# Altium PCB 主控板.PcbDoc
Units mil, origin at the board's own origin, x right, y up, seen from the top; angles counter-clockwise.
Board outline 3937.01 x 3937.01 mil, 2 copper layers (Top Layer, Bottom Layer); 40 components, 69 nets, 242 pads, 9 vias.
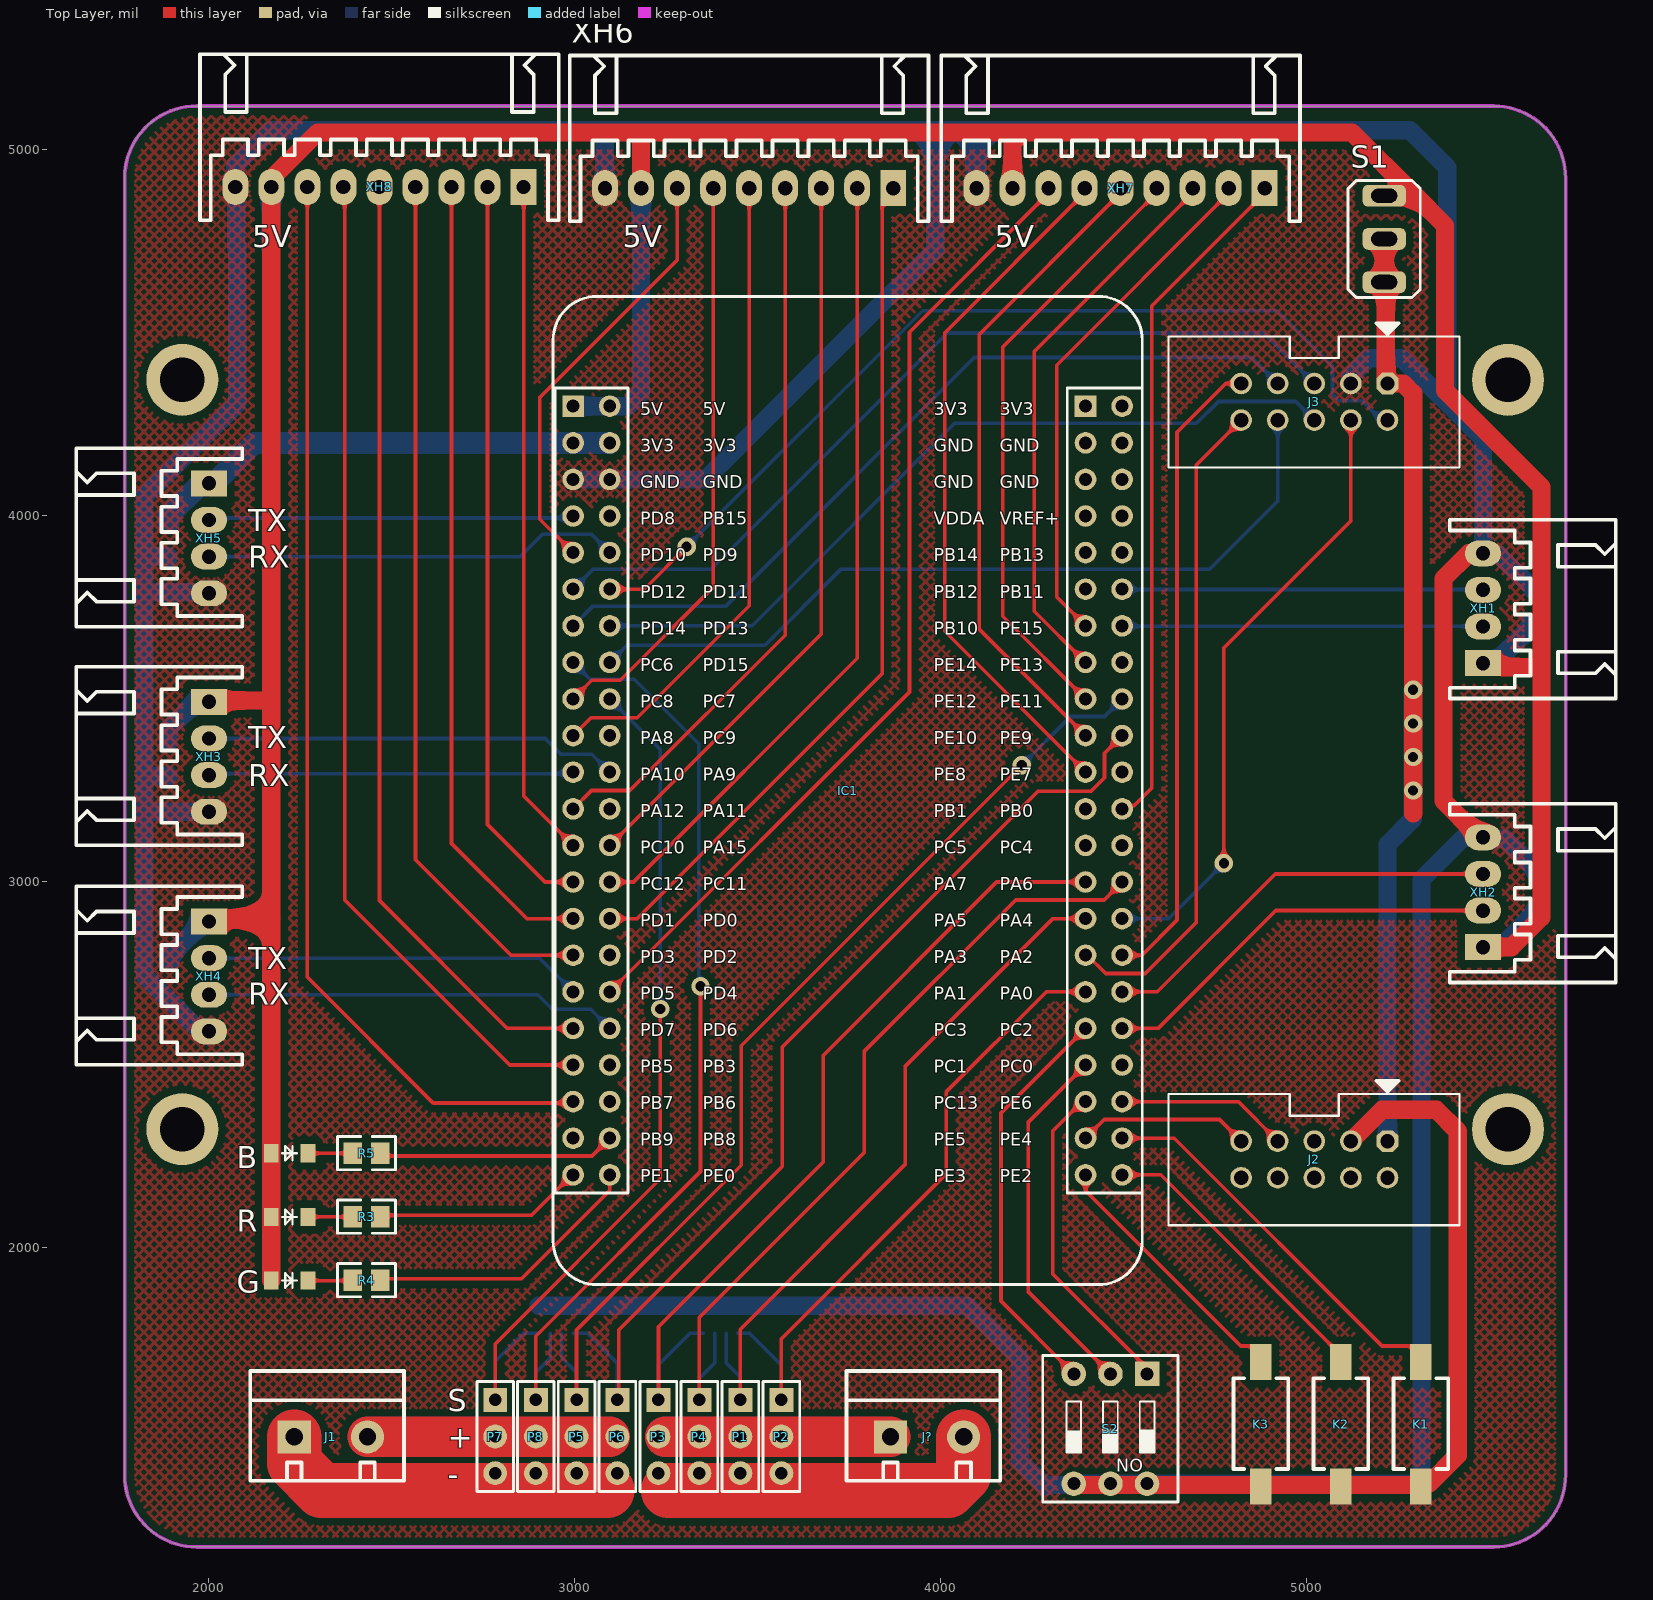
[diagram p0: Top Layer view]
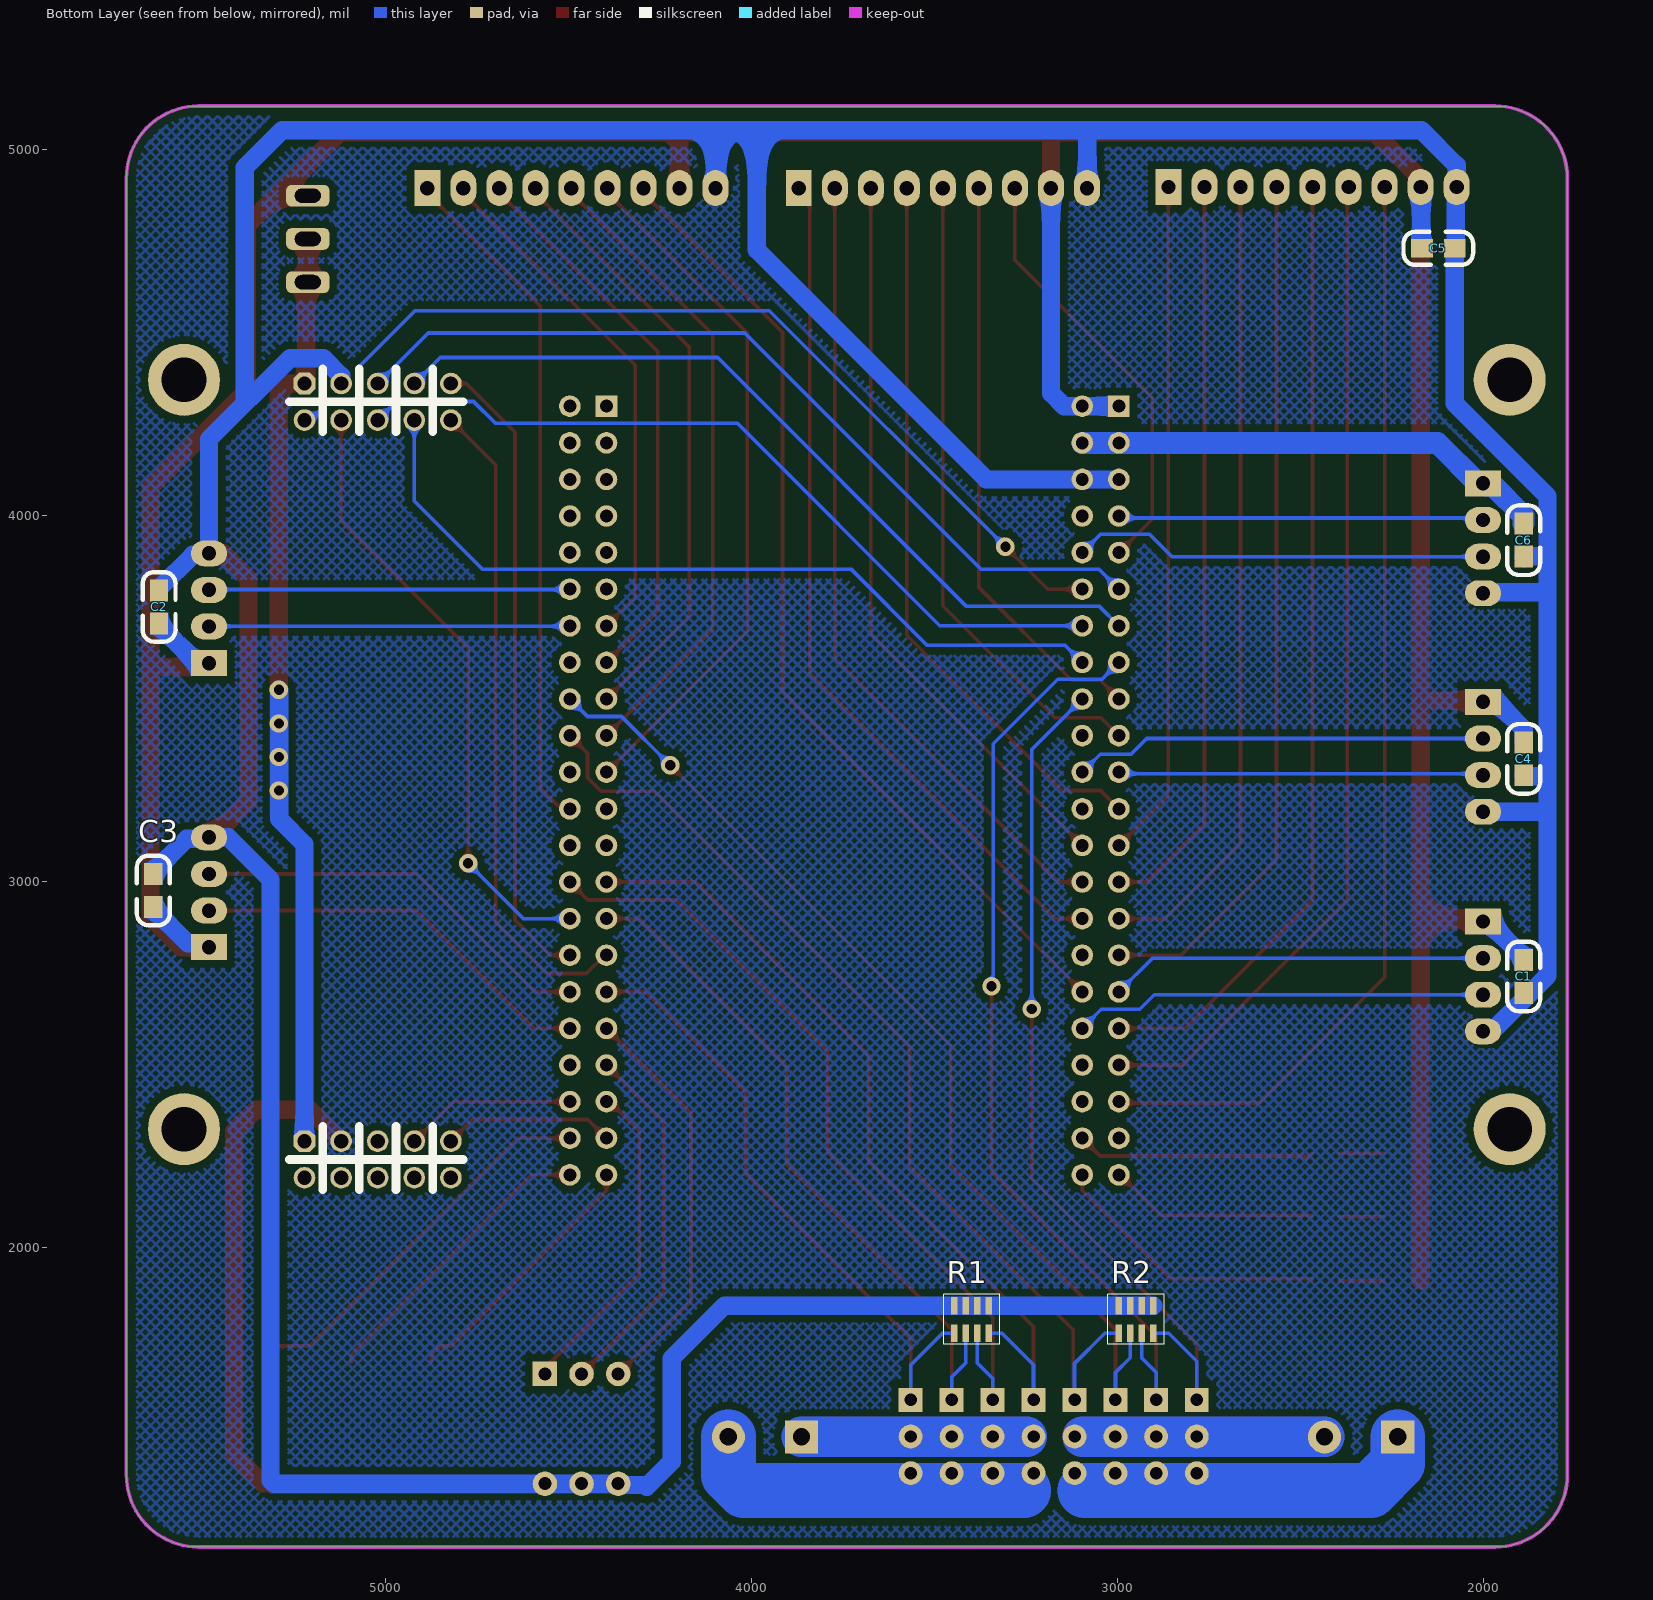
[diagram p1: Bottom Layer view, seen from below]

## Layer stack, top to bottom
Top Solder: solder mask 0.4, Solder Resist, Dk 3.5
Top Layer: signal copper 1.4
Dielectric 1: dielectric 12.6, FR-4, Dk 4.8
Bottom Layer: signal copper 1.4
Bottom Solder: solder mask 0.4, Solder Resist, Dk 3.5

## Board outline
1771.65,1377.95 ccw(c1968.5,1377.95) 1968.5,1181.1 5511.81,1181.1 ccw(c5511.81,1377.95) 5708.66,1377.95 5708.66,4921.26 ccw(c5511.81,4921.26) 5511.81,5118.11 1968.5,5118.11 ccw(c1968.5,4921.26) 1771.65,4921.26

## Design rules (kind name [scope] priority, off if disabled: settings)
Clearance [All] p1: gap=10 ignorepadtopadclearanceinfootprint=FALSE
PolygonConnect [All] p1: connectstyle=Direct reliefconductorwidth=10 reliefentries=4 polygonreliefangle="90 Angle" airgapwidth=10
RoutingVias [All] p1: holewidth=15.75 width=31.5 viastyle="Through Hole" minholewidth=15.75 minwidth=31.5 maxholewidth=28 maxwidth=50
SolderMaskExpansion [All] p1: expansion=4
Width [All] p1: maxlimit=19685.04 minlimit=10 preferedwidth=50 minimp=50.000000 maximp=50.000000 favimp=50.000000
30 further rules are at their usual default settings.

## Components (designator, comment, footprint, x,y, rotation, side; value= is the part's Value field where it differs from the comment)
B "LED" LED(0805) 2222.4,2257 r0 top (schematic designator LED3)
C1 "10uF" 0805C 1891.4,2696 r90 bottom
C2 "0.1uF" 0805C 5619,3794 r270 bottom
C3 "0.1uF" 0805C 5634.6,3019.29 r270 bottom
C4 "0.1uF" 0805C 1891.4,3290.35 r90 bottom
C5 "0.1uF" 0805C 2080,4729 r0 bottom
C6 "0.1uF" 0805C 1891.4,3887.71 r90 bottom
G "LED" LED(0805) 2222.4,1909 r0 top (schematic designator LED2)
IC1 "核心板" 核心板 3048.21,2234.79 r0 top locked
J1 "KF301-2P" KF301-5.0-2P 2235,1482 r0 top
J2 "IDC-10P" IDC2.54-10P 5222,2290 r180 top
J3 "IDC-10P" IDC2.54-10P 5222,4360 r180 top
J? "KF301-2P" KF301-5.0-2P 3864,1482 r0 top
K1 "KEY" SMD-3X6X4.3 5313,1686 r270 top
K2 "KEY" SMD-3X6X4.3 5094.5,1686 r270 top
K3 "KEY" SMD-3X6X4.3 4876,1686 r270 top
P1 "Header 3" "Header 3" 3454,1484 r0 top
P2 "Header 3" "Header 3" 3566,1484 r0 top
P3 "Header 3" "Header 3" 3230,1484 r0 top
P4 "Header 3" "Header 3" 3342,1484 r0 top
P5 "Header 3" "Header 3" 3006.29,1484 r0 top
P6 "Header 3" "Header 3" 3118,1484 r0 top
P7 "Header 3" "Header 3" 2784,1484 r0 top
P8 "Header 3" "Header 3" 2895.14,1484 r0 top
R "LED" LED(0805) 2222.4,2083 r0 top (schematic designator LED1)
R1 "Res-4" 排阻(4位贴片) 3446,1767 r90 bottom
R2 "Res-4" 排阻(4位贴片) 2997,1767 r90 bottom
R3 "10K" 0805 2432.4,2083.5 r0 top
R4 "10K" 0805 2432.4,1910 r0 top
R5 "10K" 0805 2432.4,2257 r0 top
S1 "钮子开关" 钮子开关(小) 5213,4873.11 r270 top
S2 "SW3-DIP6" DIP-3P 4465,1504 r180 top
XH1 "XH4" XH4/2.54mm/90 5483,3596 r90 top locked
XH2 "XH4" XH4/2.54mm/90 5483,2820 r90 top locked
XH3 "XH4" XH4/2.54mm/90 2002,3490 r270 top
XH4 "XH4" XH4/2.54mm/90 2002,2890 r270 top
XH5 "XH4" XH4/2.54mm/90 2002,4087 r270 top
XH6 "XH9" XH9/2.54mm/90 3871.55,4894 r180 top
XH7 "XH9" XH9/2.54mm/90 4886.43,4894 r180 top
XH8 "XH9" XH9/2.54mm/90 2861.43,4897 r180 top locked

## Footprints (in the part's own frame and the unit in brackets; to place one, negate y for a bottom-side part, rotate by r counter-clockwise, add the part's x,y. Pads: shape width x height; smd on the part's side, far side on the other; paste and mask are expansions set on the pad)
0805 [mm]
  rect 1.3x1.5 smd: 1(-0.95,0) 2(0.95,0)
  silkscreen extent -2,-1.15 2,1.15, body extent -1,-0.63 1,0.63, height 0.55
0805C [mil]
  rect 60x50 smd: 1(-0.71,-0.4) 2(89.29,-0.4)
  silkscreen extent -51,-45 139,45, body extent 6,-25 84,25, height 31
DIP-3P [mm] "9.2*9.9*7mm"
  rect 1.7x1.7 hole 0.9: 1(-2.54,-3.81)
  round 1.7 hole 0.9: 2(0,-3.81) 3(2.54,-3.81) 4(2.54,3.81) 5(0,3.81) 6(-2.54,3.81)
  silkscreen extent -4.7,-5.08 4.7,5.08, body extent -4.57,-4.95 4.61,4.95, height 6.65
"Header 3" [mil]
  rect 65x65 hole 34: 1(0,99)
  round 65 hole 34: 2(0,-1) 3(0,-101)
  silkscreen extent -50,-151 50,149, body extent -50,-151 50,149, height 336
IDC2.54-10P [mm]
  oct 1.5x1.5 hole 1: 1(0,0)
  round 1.5 hole 1: 2(0,2.54) 3(2.54,0) 4(2.54,2.54) 5(5.08,0) 6(5.08,2.54) 7(7.62,0) 8(7.62,2.54) 9(10.16,0) 10(10.16,2.54)
  silkscreen extent -5,-4.19 15.2,5.84, body extent -5.07,-2.98 15.23,5.87, height 9.13
KF301-5.0-2P [mm] "可拼接端子/6A"
  rect 2.3x2.3 hole 1.2: 1(0,0)
  round 2.3 hole 1.2: 2(5.08,0)
  silkscreen extent -3.05,-3.05 7.62,4.57, body extent -3,-3.09 7.5,4.51, height 10.05
LED(0805) [mil]
  rect 40x50 smd: 1(-50,0) 2(50,0)
  silkscreen extent -20,-20 20,20, body extent -37,-24 43,25, height 43
SMD-3X6X4.3 [mm]
  rect 2.5x1.5 smd: 1(0,0) 3(8.636,0)
  silkscreen extent 1.11,-1.9 7.41,1.9, body extent -0.41,-1.78 8.79,1.72, height 4.4
XH4/2.54mm/90 [mm]
  rect 1.8x2.5 hole 1: 1(0,0)
  oval 1.8x2.5 hole 1: 2(2.54,0) 3(5.08,0) 4(7.62,0)
  silkscreen extent -2.45,-9.2 9.95,2.3, body extent -2.45,-9.2 9.95,2.3, height 6.1
XH9/2.54mm/90 [mm]
  rect 1.8x2.5 hole 1: 1(0,0)
  oval 1.8x2.5 hole 1: 2(2.5,0) 3(5,0) 4(7.5,0) 5(10,0) 6(12.5,0) 7(15,0) 8(17.5,0) 9(20,0)
  silkscreen extent -2.45,-9.2 22.45,2.3, body extent -2.45,-9.2 22.45,2.3, height 6.1
排阻(4位贴片) [mm]
  rect 1.22x0.45 smd: 1(-0.051,0.013) 2(1.869,0.013) 3(-0.051,-0.787) 4(1.869,-0.787) 5(-0.051,-1.587) 6(1.869,-1.587) 7(-0.051,-2.387) 8(1.869,-2.387)
  silkscreen extent -0.81,-3.14 2.64,0.76, body extent 0.1,-2.79 1.7,0.41, height 0.59
核心板 [mm]
  rect 1.5x1.5 hole 0.9: 1(-1.301,52.405) 45(34.259,52.405)
  round 1.5 hole 0.9: 2(-1.301,49.865) 3(-1.301,47.325) 4(-1.301,44.785) 5(-1.301,42.245) 6(-1.301,39.705) 7(-1.301,37.165) 8(-1.301,34.625) 9(-1.301,32.085) 10(-1.301,29.545) 11(-1.301,27.005) 12(-1.301,24.465) 13(-1.301,21.925) 14(-1.301,19.385) 15(-1.301,16.845) 16(-1.301,14.305) 17(-1.301,11.765) 18(-1.301,9.225) 19(-1.301,6.685) 20(-1.301,4.145) 21(-1.301,1.605) 22(-1.301,-0.935) 23(1.239,-0.935) 24(1.239,1.605) 25(1.239,4.145) 26(1.239,6.685) 27(1.239,9.225) 28(1.239,11.765) 29(1.239,14.305) 30(1.239,16.845) 31(1.239,19.385) 32(1.239,21.925) 33(1.239,24.465) 34(1.239,27.005) 35(1.239,29.545) 36(1.239,32.085) 37(1.239,34.625) 38(1.239,37.165) 39(1.239,39.705) 40(1.239,42.245) 41(1.239,44.785) 42(1.239,47.325) 43(1.239,49.865) 44(1.239,52.405) 46(34.259,49.865) 47(34.259,47.325) 48(34.259,44.785) 49(34.259,42.245) 50(34.259,39.705) 51(34.259,37.165) 52(34.259,34.625) 53(34.259,32.085) 54(34.259,29.545) 55(34.259,27.005) 56(34.259,24.465) 57(34.259,21.925) 58(34.259,19.385) 59(34.259,16.845) 60(34.259,14.305) 61(34.259,11.765) 62(34.259,9.225) 63(34.259,6.685) 64(34.259,4.145) 65(34.259,1.605) 66(34.259,-0.935) 67(36.799,-0.935) 68(36.799,1.605) 69(36.799,4.145) 70(36.799,6.685) 71(36.799,9.225) 72(36.799,11.765) 73(36.799,14.305) 74(36.799,16.845) 75(36.799,19.385) 76(36.799,21.925) 77(36.799,24.465) 78(36.799,27.005) 79(36.799,29.545) 80(36.799,32.085) 81(36.799,34.625) 82(36.799,37.165) 83(36.799,39.705) 84(36.799,42.245) 85(36.799,44.785) 86(36.799,47.325) 87(36.799,49.865) 88(36.799,52.405)
  silkscreen extent -2.7,-8.56 38.2,60.03, body extent -2.49,-2.33 37.99,53.8, height 8.5
钮子开关(小) [mm]
  rrect50% 1.5x3 hole 1 slot 1.8 at 90 deg: 1(0,0) 2(3,0) 3(6,0)
  silkscreen extent -1.06,-2.5 7.06,2.5

## Part data
B G R: "发光二极管"
C1 C2 C3 C4 C5 C6: library part CAP, "无极性电容"
P1 P2 P3 P4 P5 P6 P7 P8: "排针"
R1 R2: "排阻"
R3 R4 R5: library part Res, "通用电阻"
S1: "大功率开关"

## Free pads (board coordinates)
  round 196.85 hole 122.05: 2(1929.13,2322.83) 2(1929.13,4370.08) 2(5551.18,2322.83) 2(5551.18,4370.08)

## Via types
v1: diameter 50, hole 28, Top Layer to Bottom Layer, 9 vias

## Nets (pads, with @x,y where several pads share a name; then routed paths per layer and width w, separated by ;. In a path a pad name is that pad's centre, name@x,y a point inside that pad or via, vN(x,y) a via of type N, cw(c..) or ccw(c..) an arc to the next point about the centre after c; other vN are vias at no path point)
3.3V0: C6.2 IC1.2 IC1.43 XH5.1 | length 1309.8
  Bottom Layer w60: C6.2 1892,3978 1892,3999 1974.57,4081.57 1996.57,4081.57 XH5.1 2015.78,4087 2126.78,4198 IC1.2 IC1.43
5V0: B.1 C1.2 C2.2 C3.2 C4.2 C5.2 G.1 IC1.1 IC1.44 R.1 S1.1 XH1.1 XH2.1 XH3.1 XH4.1 XH6.8 XH7.8 XH8.8 | length 11133.8
  Top Layer w50: XH4.1 2010,2898 2172.45,2898 ; XH3.1 2006,3494 2172.45,3494 ; G.1 G.1 2172.45,2898 ; XH6.8 3182.57,5040.57 3188,5046 ; XH7.8 4197.45,5016.71 4226.74,5046 ; S1.1 5297.89,4873.11 ; XH2.1 5561,2820 5643,2902 5643,3585.57 ; XH1.1 5496.78,3596 5507.21,3585.57 5643,3585.57 ; 2172.45,2898 2172.45,3494 ; 2172.45,3494 XH8.8 2172.45,4919.64 2298.81,5046 3188,5046 ; 3188,5046 4226.74,5046 ; 4226.74,5046 5125,5046 5297.89,4873.11 ; 5297.89,4873.11 5379,4792 5379,4341 5643,4077 5643,3585.57
  Bottom Layer w50: C1.2 1891,2792.78 1988.22,2890 XH4.1 ; C4.2 1891,3416.05 1954.52,3479.57 1991.57,3479.57 XH3.1 ; C5.2 2170.87,4729.4 2170.87,4895.42 XH8.8 ; IC1.1 IC1.44 3147,4298 3182.57,4333.57 XH6.8 ; XH2.1 5493.43,2830.43 5540.43,2830.43 5635,2925 C3.2 ; XH1.1 5493.43,3606.43 5526.13,3606.43 5619.4,3699.71 C2.2
6V: J1.2 P5.2 P6.2 P7.2 P8.2 | length 1323.7
  Top Layer w110: J1.2 2784,1482 3006.29,1482 3062,1482 ; 3063,1483 3062,1482 ; P6.2@3097,1482 3062,1482
  Bottom Layer w110: J1.2 P7.2@2784,1482 ; P7.2@2785,1482 P6.2@3096.29,1482
6V0: J?.1 P1.2 P2.2 P3.2 P4.2 | length 1230
  Top Layer w110: P3.2@3249,1482 J?.1
  Bottom Layer w110: P3.2@3249,1482 3454,1482 J?.1
B: IC1.24 R5.2 | length 659.7
  Top Layer w10: R5.2 2485.8,2241 2485.8,2244.88 2490.39,2249.47 3048.47,2249.47 IC1.24
BM1: IC1.64 S2.1 | length 893.4
  Top Layer w10: IC1.64 4393.74,2394.74 4384.74,2394.74 4307,2317 4307,1928 4565,1670 S2.1
BM2: IC1.63 S2.2 | length 1002.2
  Top Layer w10: IC1.63 4240,2341 4240,1879 S2.2
BM3: IC1.62 S2.3 | length 1122.1
  Top Layer w10: S2.3 4166,1853 4166,2367 IC1.62
CS1: IC1.82 XH1.2 | length 986.8
  Bottom Layer w10: IC1.82 4498,3697 5482,3697 XH1.2
CS2: IC1.83 XH1.3 | length 986.8
  Bottom Layer w10: IC1.83 4498,3797 5482,3797 XH1.3
CS3: IC1.71 XH2.2 | length 1119.4
  Top Layer w10: IC1.71 4595,2598 4917,2920 XH2.2
CS4: IC1.72 XH2.3 | length 1119.4
  Top Layer w10: IC1.72 4593,2698 4915,3020 XH2.3
DGND: J?.2 P1.3 P2.3 P3.3 P4.3 | length 1857.6
  Top Layer w150: 3257,1335 4021,1335 4064,1378 J?.2
  Bottom Layer w150: 3257,1335 4021,1335 4064,1378 J?.2
DY: J2.1 J3.1 S1.2 S1.3 | length 2888.9
  Top Layer w50: S1.2 S1.3 5213.06,4636.89 5217.59,4632.36 5217.59,4364.41 J3.1 5265,4360 5292,4333 v1(5292,3523) 5292,3186
  Bottom Layer w50: J2.1 5222,3101 5291,3170 5291,3522 v1(5292,3523)
  other v1: 5292,3248 5292,3339.67 5292,3431.33
EN: IC1.39 J3.2 | length 2609.2
  Top Layer w10: IC1.39 3191,3798 v1(3307,3914)
  Bottom Layer w10: v1(3307,3914) 3952,4559 4920,4559 5071.74,4407.26 5071.74,4330.26 5089,4313 5152.06,4313 5195.67,4269.39 5207.61,4269.39 5217,4260 J3.2
G: IC1.23 R4.2 | length 774
  Top Layer w10: R4.2 2469.8,1913.94 2855.94,1913.94 3097,2155 IC1.23
GND: C1.1 C2.1 C3.1 C4.1 C5.1 C6.1 IC1.3 IC1.42 J2.3 J3.3 K1.3 K2.3 K3.3 R1.2 R1.4 R1.6 R1.8 R2.2 R2.4 R2.6 R2.8 S2.4 S2.5 S2.6 XH1.4 XH2.4 XH3.4 XH4.4 XH5.4 XH6.9 XH7.9 XH8.9 | length 18054.3
  Top Layer w50: S2.4 4368.24,1350.76 5308.47,1350.76 5308.47,1354.66 5336.66,1354.66 5414,1432 5414,2317 5355,2376 5208,2376 J2.3 ; XH2.4 5474.87,3120 5375,3219.87 5375,3827 5444,3896 XH1.4
  Bottom Layer w50: C4.1 1891,3287 1826,3287 ; C6.1@1891,3882 C6.1 1891,3888 1826,3888 ; XH3.4 1826,3190 ; XH5.4 1999,3790 1826,3790 ; R2.8 R2.6 R2.4 R2.2 R1.8 R1.6 R1.4 R1.2 4074.41,1840.59 4219,1696 4219,1414 4287,1346 4291.76,1350.76 4361.76,1350.76 S2.4 S2.5 S2.6 5305.57,1354 5315,1363.42 5315,3005 5430,3120 XH2.4 5486.99,3116.01 5543.99,3116.01 5635,3025 C3.1 ; IC1.3 IC1.42 3359,4098 3986,4725 3986,5052 ; XH6.9 3083,4895.15 3083,5052 ; XH7.9 4097,4896.02 4097,5052 ; J3.3 5122,4381 5170.11,4429.11 5261.89,4429.11 5483,4208 XH1.4 5486.99,3892.01 5527.1,3892.01 5619.4,3799.71 C2.1 ; 5385.28,4311 5385.28,4949.72 5283,5052 4097,5052 ; 1826,3190 1826,3287 ; 1826,3190 1826,2742 XH4.4@1974.01,2593.99 ; 1826,3287 1826,3790 ; 1826,3790 1826,3888 ; 1826,3888 1826,4052 2079.29,4305.29 C5.1 2076.66,4729.4 2076.66,4894.36 XH8.9 2074.02,4956.02 2170,5052 3083,5052 ; XH4.4@1974.01,2593.99 1978,2590 XH4.4 1998.01,2593.99 XH4.4@1974.01,2593.99 ; 3083,5052 3986,5052 ; 3986,5052 4097,5052
HW1: IC1.28 XH7.7 | length 2692.6
  Top Layer w10: IC1.28 3916,3517 3916,4500.35 4295.87,4880.22 XH7.7
HW2: IC1.55 XH7.6 | length 1913.8
  Top Layer w10: XH7.6 4394.3,4880.22 4012,4497.92 4012,3683 IC1.55
HW3: IC1.54 XH7.5 | length 1775.9
  Top Layer w10: IC1.54 4107,3688 4107,4494.5 4492.72,4880.22 XH7.5
HW4: IC1.53 XH7.4 | length 1664.9
  Top Layer w10: IC1.53 4171,3724 4171,4460.07 4589.08,4878.15 4591.15,4878.15 XH7.4
HW5: IC1.52 XH7.3 | length 1533.2
  Top Layer w10: IC1.52 4257,3738 4257,4447.65 4689.57,4880.22 XH7.3
HW6: IC1.51 XH7.2 | length 1423.4
  Top Layer w10: IC1.51 4318,3777 4318,4410.22 4788,4880.22 XH7.2
HW7: IC1.77 XH7.1 | length 1871.4
  Top Layer w10: IC1.77 4506,3207 4530,3207 4578,3255 4578,4571.8 4886.43,4880.22 XH7.1
HW8: IC1.32 XH6.3 | length 2035.3
  Top Layer w10: IC1.32 3674.7,3675.7 XH6.3
HW9: IC1.31 XH6.2 | length 2214.1
  Top Layer w10: IC1.31 3162,2998 3773.13,3609.13 XH6.2
HW10: IC1.30 XH6.1 | length 2360.8
  Top Layer w10: IC1.30 3172,2898 3841.12,3567.12 3841.12,4863.57 XH6.1
HW11: IC1.5 XH6.7 | length 1189
  Top Layer w10: IC1.5 2906,3989 2906,4322 3281,4697 XH6.7
HW12: IC1.9 XH6.6 | length 1600.1
  Top Layer w10: IC1.9 3048,3549 3126,3549 3379.43,3802.43 XH6.6
HW13: IC1.10 XH6.5 | length 1769
  Top Layer w10: IC1.10 3046,3447 3172,3447 3477.85,3752.85 XH6.5
HW14: IC1.12 XH6.4 | length 1997.5
  Top Layer w10: IC1.12 3047,3248 3152,3248 3576.28,3672.28 XH6.4
HW15: IC1.13 XH8.1 | length 1894.8
  Top Layer w10: XH8.1 2890,4868.43 2862,4868.43 2862,3233 IC1.13
HW16: IC1.14 XH8.2 | length 2041
  Top Layer w10: XH8.2 2763,3155 2920,2998 IC1.14
HW17: IC1.15 XH8.3 | length 2211.1
  Top Layer w10: XH8.3 2664.57,3103.43 2870,2898 IC1.15
HW18: IC1.16 XH8.4 | length 2377
  Top Layer w10: XH8.4 2566.15,3058.85 2827,2798 IC1.16
HW19: IC1.18 XH8.5 | length 2623.7
  Top Layer w10: XH8.5 2467.72,2947.28 2817,2598 IC1.18
HW20: IC1.19 XH8.6 | length 2760.3
  Top Layer w10: XH8.6 2373,4893.3 2373,2949 2824,2498 IC1.19
HW21: IC1.20 XH8.7 | length 3029.5
  Top Layer w10: XH8.7 2270.87,2737.53 2614.4,2394 2993,2394 IC1.20
K1: IC1.68 K1.1 | length 1081
  Top Layer w10: IC1.68 4639,2298 5206.79,1730.21 5288.47,1730.21 5313,1705.69 K1.1
K2: IC1.67 K2.1 | length 821.1
  Top Layer w10: IC1.67 4602.19,2198 5094.5,1705.69 K2.1
K3: IC1.66 K3.1 | length 728.4
  Top Layer w10: IC1.66 4397.53,2197.47 4397.53,2153.47 4820.79,1730.21 4851.47,1730.21 4876,1705.69 K3.1
MGND: J1.1 P5.3 P6.3 P7.3 P8.3 | length 1915.3
  Top Layer w150: J1.1 2235,1410 2309,1336 3090,1336
  Bottom Layer w150: J1.1 2235,1410 2309,1336 2895.14,1336 3090,1336
NetLED1_2: R3.1 R.2 | length 122.8
  Top Layer w10: R.2 2394.5,2083 R3.1
NetLED2_2: G.2 R4.1 | length 123
  Top Layer w10: G.2 2394,1909 R4.1
NetLED3_2: B.2 R5.1 | length 122.6
  Top Layer w10: B.2 R5.1
PA1: IC1.61 P2.1 R1.1 | length 1771.4
  Top Layer w10: P2.1 3566,1750 4016,2200 4016,2424 4290,2698 IC1.61
  Bottom Layer w10: R1.1 3479,1765 3566,1678 ; P2.1 3566,1677
PA5: IC1.59 P1.1 R1.3 | length 1955.9
  Top Layer w10: P1.1 3454,1776 3904,2226 3904,2494 4308,2898 IC1.59
  Bottom Layer w10: R1.3 3415,1684 3454,1645 P1.1
PA6: IC1.75 P4.1 R1.5 | length 2234.4
  Top Layer w10: P4.1 3342,1808.5 3792,2258.5 3792,2535 4206,2949 4448,2949 IC1.75
  Bottom Layer w10: P4.1 3342,1642 3383.5,1683.5 R1.5
PA7: IC1.58 P3.1 R1.7 | length 2293.4
  Top Layer w10: P3.1 3230,1783 3680,2233 3680,2524 4154,2998 IC1.58
  Bottom Layer w10: P3.1 3230,1678 ; 3230,1679 3316,1765 R1.7
PA9: IC1.34 XH3.2 | length 1133.1
  Bottom Layer w10: XH3.2 2921,3390 2964,3347 3048,3347 IC1.34
PA10: IC1.11 XH3.3 | length 998.3
  Bottom Layer w10: XH3.3 2006,3294 2993,3294 IC1.11
PC6: IC1.8 P8.1 R2.5 | length 2608.5
  Top Layer w10: P8.1 2895.14,1757.13 3345.14,2207.13 v1(3345.14,2713) v1@3345.14,2722.86
  Bottom Layer w10: P8.1 2895.14,1658 2934.5,1697.36 ; 2934.5,1698.36 R2.5 ; IC1.8 3005,3598 3005,3590 3043.09,3551.91 3164.09,3551.91 3340,3376 3340,2742 v1@3348,2734
PC7: IC1.36 P7.1 R2.7 | length 2454.3
  Top Layer w10: P7.1@2811.5,1610.5 P7.1 2784,1736 3235,2187 v1(3235,2651) v1@3234,2650
  Bottom Layer w10: P7.1 2784,1687.29 ; 2784,1688.29 2860.71,1765 R2.7 ; IC1.36 3235,3360 v1(3235,2651)
PD5: IC1.17 XH4.2 | length 1033.1
  Bottom Layer w10: XH4.2 2905,2790 IC1.17
PD6: IC1.27 XH4.3 | length 1133.1
  Bottom Layer w10: XH4.3 2900,2690 2940,2650 3045,2650 IC1.27
PD8: IC1.4 XH5.2 | length 999.6
  Bottom Layer w10: XH5.2 2007.5,3992.5 2991.5,3992.5 IC1.4
PD9: IC1.40 XH5.3 | length 1141
  Bottom Layer w10: XH5.3 2852,3887 2913,3948 3047,3948 IC1.40
PE9: IC1.79 P6.1 R2.1 | length 2724.2
  Top Layer w10: P6.1 3122,1587 3122,1775 3568,2221 3568,2547 4267,3246 4412,3246 4449,3283 4449,3350 IC1.79
  Bottom Layer w10: R2.1 3035.29,1765 3118,1682.29 ; P6.1 3118,1681.29
PE11: IC1.80 P5.1 R2.3 | length 2789.9
  Top Layer w10: P5.1 3006.29,1773.79 3456.29,2223.79 3456.29,2550.29 v1(4223,3317)
  Bottom Layer w10: 2966,1698.29 3006.29,1658 P5.1 ; 2966,1699.29 R2.3 ; v1(4223,3317) 4356,3450 4449,3450 4488,3489 4488,3498 IC1.80
R: IC1.22 R3.2 | length 564
  Top Layer w10: R3.2 2469.8,2087.44 2883.44,2087.44 IC1.22@2987,2191
SAIN1: IC1.38 J3.6 | length 2200
  Bottom Layer w10: IC1.38 3486,3698 4039.26,4251.26 4700.26,4251.26 4760,4311 4971,4311 J3.6
SAIN2: IC1.6 J3.5 | length 2372.1
  Bottom Layer w10: IC1.6 3052,3853 3374,3853 4019,4498 4884,4498 J3.5
SBIN1: IC1.37 J3.8 | length 2228.7
  Bottom Layer w10: IC1.37 3144,3645 3521,3645 3729,3853 4736,3853 4922,4039 J3.8
SBIN2: IC1.7 J3.7 | length 2258
  Bottom Layer w10: IC1.7 3050,3751 3413,3751 4093,4431 4851,4431 J3.7
SCIN1: IC1.60 J3.10 | length 1804.2
  Top Layer w10: IC1.60 4402,2798 4452,2748 4560,2748 4699,2887 4699,4137 J3.10
SCIN2: IC1.73 J3.9 | length 1752.9
  Top Layer w10: IC1.73 4551,2798 4647,2894 4647,4227 4780,4360 J3.9
SDIN1: IC1.65 J2.9 | length 470.6
  Top Layer w10: IC1.65 4448,2349 4763,2349 J2.9
SDIN2: IC1.69 J2.7 | length 469.7
  Top Layer w10: IC1.69 4814,2398 J2.7
VADC: IC1.74 J3.4 | length 1695.3
  Top Layer w10: v1(4775,3049) 4775,3638 5122,3985 J3.4
  Bottom Layer w10: IC1.74 4624,2898 v1(4775,3049)
pads on no net: IC1.21 IC1.25 IC1.26 IC1.29 IC1.33 IC1.35 IC1.41 IC1.45 IC1.46 IC1.47 IC1.48 IC1.49 IC1.50 IC1.56 IC1.57 IC1.70 IC1.76 IC1.78 IC1.81 IC1.84 IC1.85 IC1.86 IC1.87 IC1.88 J2.2 J2.4 J2.5 J2.6 J2.8 J2.10

## Polygon pours and split planes (outlines as drawn)
GND on Top Layer (hatched 45Degree grid 20 track 8, remove dead copper, pour order 14): 1773.5,5099.5 1773.5,1191.5 1780,1185 5707,1185 5707,5112 5714,5119
GND on Top Layer (hatched 45Degree grid 20 track 8, remove dead copper, pour order 12): 1767,5106 1780,5093 1780,1185 5707,1185 5714,1178 5714,5119
GND on Bottom Layer (hatched 45Degree grid 20 track 8, remove dead copper, pour order 16): 1773.5,5099.5 1773.5,1191.5 5700.5,1191.5 5714,1178 5714,5119

## Keep-outs
Keep-Out Layer:
  the board outline again, w10

## Silkscreen, mask and mechanical layers (free items; w line width, h text height)
Top Overlay:
  text "5V" at 2120,4732 h60
  text "5V" at 3133,4732 h60
  text "5V" at 4149,4732 h60
  text "TX" at 2109,3957 h60
  text "RX" at 2109,3857 h60
  text "TX" at 2109,3363 h60
  text "RX" at 2109,3259 h60
  text "TX" at 2109,2760 h60
  text "RX" at 2109,2662 h60
  text "S" at 2654,1552 h60
  text "+" at 2654,1452 h60
  text "-" at 2654,1350 h60

## Text inside footprints (layer, text, board x,y; h text height)
IC1: Top Overlay "PD8" at 3180,3973.51 h35; Top Overlay "PB15" at 3351.05,3973.51 h35; Top Overlay "PD10" at 3180,3873.74 h35; Top Overlay "PD9" at 3351.05,3873.74 h35; Top Overlay "PD12" at 3180,3773.98 h35; Top Overlay "PD11" at 3351.05,3773.98 h35; Top Overlay "PD13" at 3351.05,3674.22 h35; Top Overlay "PD14" at 3180,3674.22 h35; Top Overlay "PD15" at 3351.05,3574.46 h35; Top Overlay "PC6" at 3180,3574.46 h35; Top Overlay "PC7" at 3351.05,3474.7 h35; Top Overlay "PC8" at 3180,3474.7 h35; Top Overlay "PC9" at 3351.05,3374.93 h35; Top Overlay "PA8" at 3180,3374.93 h35; Top Overlay "PA9" at 3351.05,3275.17 h35; Top Overlay "PA10" at 3180,3275.17 h35; Top Overlay "PA11" at 3351.05,3175.41 h35; Top Overlay "PA12" at 3180,3175.41 h35; Top Overlay "PA15" at 3351.05,3075.65 h35; Top Overlay "PC10" at 3180,3075.65 h35; Top Overlay "PC11" at 3351.05,2975.89 h35; Top Overlay "PC12" at 3180,2975.89 h35; Top Overlay "PD0" at 3351.05,2876.13 h35; Top Overlay "PD1" at 3180,2876.13 h35; Top Overlay "PD2" at 3351.05,2776.36 h35; Top Overlay "PD3" at 3180,2776.36 h35; Top Overlay "PD4" at 3351.05,2676.6 h35; Top Overlay "PD5" at 3180,2676.6 h35; Top Overlay "PD6" at 3351.05,2576.84 h35; Top Overlay "PD7" at 3180,2576.84 h35; Top Overlay "PB3" at 3351.05,2477.08 h35; Top Overlay "PB5" at 3180,2477.08 h35; Top Overlay "PB6" at 3351.05,2377.32 h35; Top Overlay "PB7" at 3180,2377.32 h35; Top Overlay "PB8" at 3351.05,2277.55 h35; Top Overlay "PB9" at 3180,2277.55 h35; Top Overlay "PE0" at 3351.05,2177.79 h35; Top Overlay "PE1" at 3180,2177.79 h35; Top Overlay "PB14" at 3982.21,3873.74 h35; Top Overlay "PB13" at 4162,3873.74 h35; Top Overlay "PB12" at 3982.21,3773.98 h35; Top Overlay "PB11" at 4162,3773.98 h35; Top Overlay "PB10" at 3982.21,3674.22 h35; Top Overlay "PE15" at 4162,3674.22 h35; Top Overlay "PE14" at 3982.21,3574.46 h35; Top Overlay "PE13" at 4162,3574.46 h35; Top Overlay "PE12" at 3982.21,3474.7 h35; Top Overlay "PE11" at 4162,3474.7 h35; Top Overlay "PE10" at 3982.21,3374.93 h35; Top Overlay "PE9" at 4162,3374.93 h35; Top Overlay "PE8" at 3982.21,3275.17 h35; Top Overlay "PE7" at 4162,3275.17 h35; Top Overlay "PB1" at 3982.21,3175.41 h35; Top Overlay "PB0" at 4162,3175.41 h35; Top Overlay "PC5" at 3982.21,3075.65 h35; Top Overlay "PC4" at 4162,3075.65 h35; Top Overlay "PA7" at 3982.21,2975.89 h35; Top Overlay "PA6" at 4162,2975.89 h35; Top Overlay "PA5" at 3982.21,2876.13 h35; Top Overlay "PA4" at 4162,2876.13 h35; Top Overlay "PA3" at 3982.21,2776.36 h35; Top Overlay "PA2" at 4162,2776.36 h35; Top Overlay "PA1" at 3982.21,2676.6 h35; Top Overlay "PA0" at 4162,2676.6 h35; Top Overlay "VREF+" at 4162,3973.51 h35; Top Overlay "VDDA" at 3982.21,3973.51 h35; Top Overlay "PC3" at 3982.21,2576.84 h35; Top Overlay "PC2" at 4162,2576.84 h35; Top Overlay "PC1" at 3982.21,2477.08 h35; Top Overlay "PC0" at 4162,2477.08 h35; Top Overlay "PC13" at 3982.21,2377.32 h35; Top Overlay "PE6" at 4162,2377.32 h35; Top Overlay "PE5" at 3982.21,2277.55 h35; Top Overlay "PE4" at 4162,2277.55 h35; Top Overlay "PE3" at 3982.21,2177.79 h35; Top Overlay "PE2" at 4162,2177.79 h35; Top Overlay "3V3" at 3351.05,4173.03 h35; Top Overlay "3V3" at 3180,4173.03 h35; Top Overlay "GND" at 3351.05,4073.27 h35; Top Overlay "GND" at 3180,4073.27 h35; Top Overlay "5V" at 3180,4272.79 h35; Top Overlay "5V" at 3351.05,4272.79 h35; Top Overlay "3V3" at 3982.21,4272.79 h35; Top Overlay "3V3" at 4162,4272.79 h35; Top Overlay "GND" at 3982.21,4173.03 h35; Top Overlay "GND" at 4162,4173.03 h35; Top Overlay "GND" at 3982.21,4073.27 h35; Top Overlay "GND" at 4162,4073.27 h35
S2: Top Overlay "ON" at 4555,1434 h60 r180